# Altium PCB Blue_bug.PcbDoc
Units mm, origin at the board's own origin, x right, y up, seen from the top; angles counter-clockwise.
Board outline 17.86 x 23.75 mm, 2 copper layers (Top Layer, Bottom Layer); 12 components, 12 nets, 79 pads, 45 vias.
Unrouted connection lines stored in the file: 8.
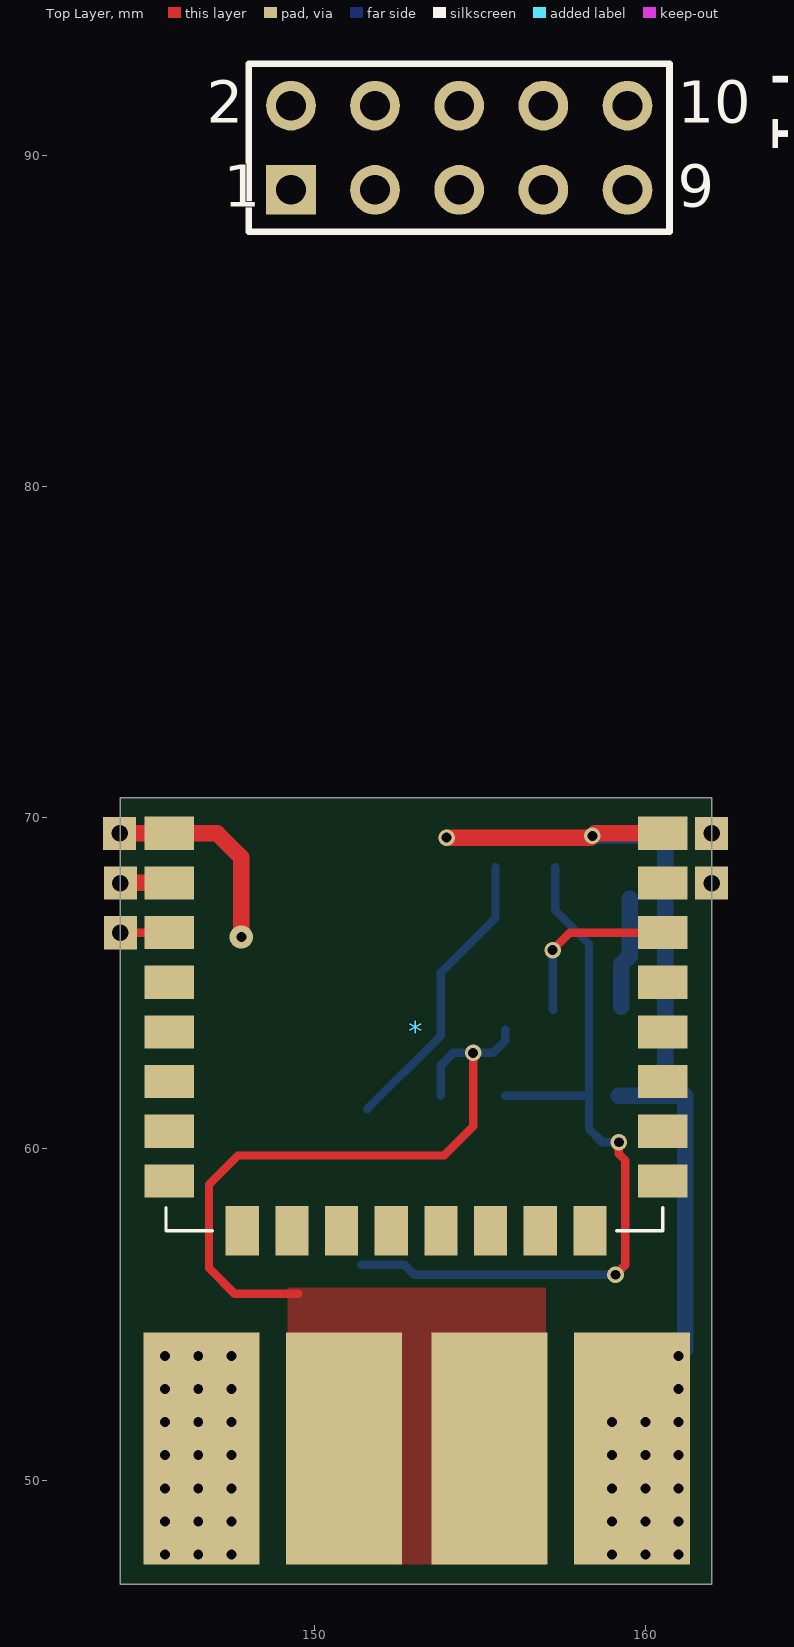
[diagram p0: Top Layer view]
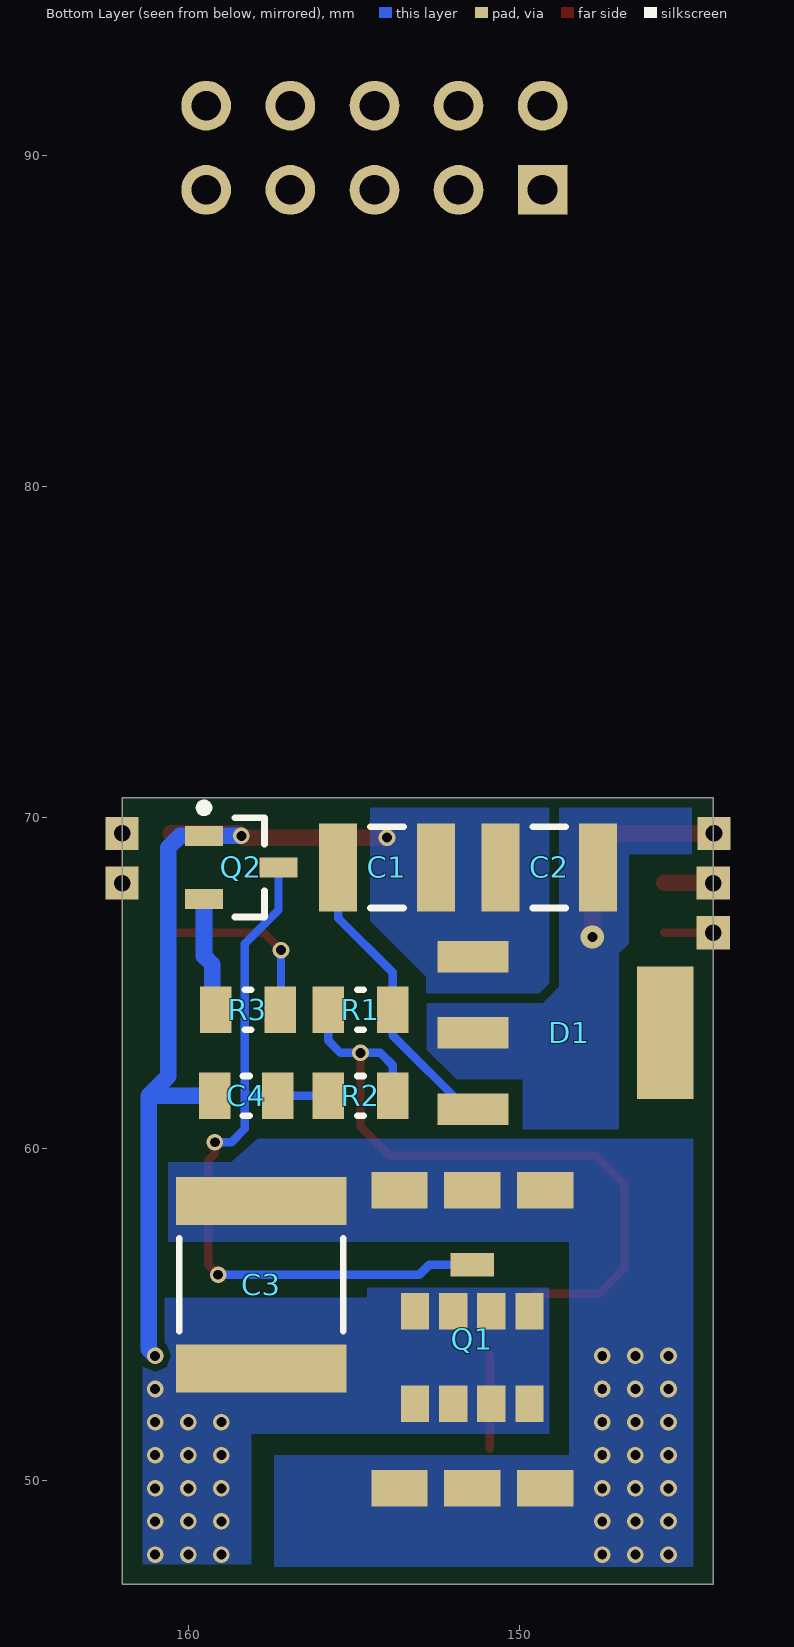
[diagram p1: Bottom Layer view, seen from below]

## Layer stack, top to bottom
Top Solder: solder mask 0.0102, Solder Resist, Dk 3.5
Top Layer: signal copper 0.0356
Dielectric 1: dielectric 0.32, FR-4, Dk 4.8
Bottom Layer: signal copper 0.0356
Bottom Solder: solder mask 0.0102, Solder Resist, Dk 3.5

## Board outline
144.145,46.85 162,46.85 162,70.6 144.145,70.6

## Design rules (kind name [scope] priority, off if disabled: settings)
Clearance Clearance_1 [All] p1: gap=0.2 except(0: Track-Fill Track-Poly Track-Region)
Clearance [All] p2: gap=0.2 except(0: Track-Fill Track-Poly Track-Region SMDPad-Via Via-Fill Via-Poly Via-Region)
PolygonConnect [All] p1: connectstyle=Direct reliefconductorwidth=0.254 reliefentries=4 polygonreliefangle="90 Angle" airgapwidth=0.254
RoutingVias [All] p1: holewidth=0.711 width=1.27 viastyle="Through Hole" minholewidth=0.3 minwidth=0.5 maxholewidth=0.711 maxwidth=1.27
SolderMaskExpansion [All] p1: expansion=0.102
Width [All] p1: maxlimit=1 minlimit=0.254 preferedwidth=0.5
30 further rules are at their usual default settings.

## Components (designator, comment, footprint, x,y, rotation, side; value= is the part's Value field where it differs from the comment)
* "JDY-08" JDY-08 160.528,57.531 r90 top
C1 "C1210" C1210 154,68.5 r0 bottom
C2 "C1210" C1210 149.1,68.5 r180 bottom
C3 "С2220" C2220 157.8,55.9 r90 bottom
C4 "0805" C0805 158.25,61.6 r180 bottom
D1 "AMS1117CD_3.3" SOT223 145.6,63.5 r270 bottom
P1 "Header 5X2" HDR2X5 149.3,88.96 r0 top
Q1 "IRF7739L2" "DIRFET L8" 151.425,58.75 r270 bottom
Q2 "PNP" SOT-23B_N 158.4,68.5 r180 bottom
R1 "R0805" R0805 154.8,64.2 r180 bottom
R2 "R0805" R0805 154.8,61.6 r180 bottom
R3 "R0805" R0805 158.2,64.2 r180 bottom

## Footprints (in the part's own frame and the unit in brackets; to place one, negate y for a bottom-side part, rotate by r counter-clockwise, add the part's x,y. Pads: shape width x height; smd on the part's side, far side on the other; paste and mask are expansions set on the pad)
C0805 [mm]
  rect 0.95x1.4 smd: 1(-0.95,0) 2(0.95,0)
  silkscreen extent -0.1,-0.6 0.1,0.6, body extent -1,-0.63 1,0.63, height 1.3
C1210 [mm] "CeramicCapasitor"
  rect 1.15x2.65 smd: 1(-1.475,0) 2(1.475,0)
  silkscreen extent -0.5,-1.22 0.5,1.23, body extent -1.6,-1.25 1.6,1.25, height 1.7
C2220 [mm] "Capacitor"
  rect 1.45x5.15 smd: 1(-2.525,0) 2(2.525,0)
  silkscreen extent -1.4,-2.47 1.4,2.48, body extent -2.8,-2.5 2.8,2.5, height 1.8
"DIRFET L8" [mm]
  rect 1.1x1.7 smd: D(0,-2.2) D(0,0) D(0,2.2) D(9,-2.2) D(9,0) D(9,2.2)
  rect 0.7x1.3 smd: G(2.25,0)
  rect 1.1x0.85 smd: S(3.65,-1.725) S(3.65,-0.575) S(3.65,0.575) S(3.65,1.725) S(6.45,-1.725) S(6.45,-0.575) S(6.45,0.575) S(6.45,1.725)
  body extent -0.7,-3.2 9.7,3.2, height 1
HDR2X5 [mm] "Connector; Header; 5x2 Position"
  rect 1.5x1.5 hole 0.9: 1(0,0)
  round 1.5 hole 0.9: 2(0,2.54) 3(2.54,0) 4(2.54,2.54) 5(5.08,0) 6(5.08,2.54) 7(7.62,0) 8(7.62,2.54) 9(10.16,0) 10(10.16,2.54)
  silkscreen extent -1.27,-1.27 11.43,3.81
JDY-08 [mm]
  rect 1x1.5 smd: 1(12,14.9) 2(10.5,14.9) 3(9,14.9) 4(7.5,14.9) 5(6,14.9) 6(4.5,14.9) 7(3,14.9) 8(1.5,14.9) 17(1.5,0) 18(3,0) 19(4.5,0) 20(6,0) 21(7.5,0) 22(9,0) 23(10.5,0) 24(12,0)
  rect 1.5x1 smd: 9(0,12.7) 10(0,11.2) 11(0,9.7) 12(0,8.2) 13(0,6.7) 14(0,5.2) 15(0,3.7) 16(0,2.2)
  silkscreen extent 0,0 0.7,15, body extent 0,0 19.6,15, height 1.5
R0805 [mm] "Chip Resistor, 2-Leads, Body 2,10x1,30mm, IPC Medium Density"
  rect 0.95x1.4 smd: 1(-0.975,0) 2(0.975,0)
  silkscreen extent -0.1,-0.6 0.1,0.6, body extent -1.1,-0.7 1.1,0.7, height 0.5
SOT223 [mm] "U?"
  rect 0.95x2.15 smd: 1(-2.3,-5.8) 2(0,-5.8) 3(2.3,-5.8)
  rect 4x1.7 smd: 4(0,0)
  body extent -2.9,-4.5 2.9,-1.1, height 3
SOT-23B_N [mm] "SOT23, 3-Leads, Body 2.9x1.3mm, Pitch 0.95mm, Lead Span 2.4mm, IPC Medium Density"
  rect 1.15x0.6 smd: 1(-1.125,0.95) 2(-1.125,-0.95) 3(1.125,0)
  silkscreen extent -1.25,-1.5 0.7,1.92, body extent -0.7,-1.5 0.7,1.5, height 1.14

## Part data
C4: "Capasitor"
P1: "Header, 5-Pin, Dual row"
Q2: "PNP Bipolar Transistor"

## Free pads (board coordinates)
  rect 3.5x7 smd: 2(146.6,50.95) 2(150.9,50.95) 2(155.3,50.95) 2(159.6,50.95)
  rect 1x1 hole 0.5: 3(144.125,69.525) 3(144.15,66.525) 3(144.15,68.025) 3(162,68.025) 3(162,69.525)

## Via types
v1: diameter 0.5/0.5 (per signal layer), hole 0.3, Top Layer to Bottom Layer, 44 vias
v2: diameter 0.7, hole 0.3, Top Layer to Bottom Layer, 1 vias

## Nets (pads, with @x,y where several pads share a name; then routed paths per layer and width w, separated by ;. In a path a pad name is that pad's centre, name@x,y a point inside that pad or via, vN(x,y) a via of type N, cw(c..) or ccw(c..) an arc to the next point about the centre after c; other vN are vias at no path point)
3.3V: *.1 C2.2 D1.2 P1.2 P1.9 pad.3@144.125,69.525 | length 6.4
  Top Layer w0.5: pad.3@144.125,69.525 *.1@145.622,69.525 ; *.1 147.069,69.531 147.8,68.8 v2(147.8,66.4)
12V: pad.2@150.9,50.95 pad.2@155.3,50.95 R1.1 R2.2 | length 22.8
  Top Layer w0.254: 149.525,55.625 147.6,55.625 146.825,56.4 146.825,58.925 147.7,59.8 153.925,59.8 154.8,60.675 v1(154.8,62.9) ; pad.2@150.9,50.95 pad.2@150.9,53.8
  Bottom Layer w0.254: R2.2 153.825,62.525 154.2,62.9 v1(154.8,62.9) 155.4,62.9 155.775,63.275 R1.1@155.775,63.6
CSN: P1.5
DC: *.2 P1.3 pad.3@144.15,68.025 | length 1.5
  Top Layer w0.5: pad.3@144.156,68.031 *.2
GND: *.24 C1.1 C2.1 C3.1 C4.1 D1.1 P1.1 pad.2@159.6,50.95 pad.3@162,69.525 Q1.S Q2.1 | length 26.7
  Top Layer w0.5: v1(154,69.4) 158.35,69.4 v1(158.4,69.45) 158.481,69.531 *.24
  Bottom Layer w0.5: v1(158.4,69.45) Q2.1 ; C4.1 161.2,61.6 ; Q2.1@159.575,69.5 Q2.1 ; v1(161,53.75) 161.2,53.95 161.2,61.6 ; Q2.1 160.25,69.45 160.604,69.096 160.604,67.041 160.6,67.037 160.6,62.2 161.2,61.6
  other v1: 159,47.75 160,47.75 161,47.75 159,48.75 160,48.75 161,48.75 159,49.75 160,49.75 161,49.75 159,50.75 160,50.75 161,50.75 159,51.75 160,51.75 161,51.75 161,52.75
IN: C3.2 pad.2@146.6,50.95 Q1.D
  other v1: 145.5,47.75 146.5,47.75 147.5,47.75 145.5,48.75 146.5,48.75 147.5,48.75 145.5,49.75 146.5,49.75 147.5,49.75 145.5,50.75 146.5,50.75 147.5,50.75 145.5,51.75 146.5,51.75 147.5,51.75 145.5,52.75 146.5,52.75 147.5,52.75 145.5,53.75 146.5,53.75 147.5,53.75
Net*_3: *.3 P1.4 pad.3@144.15,66.525 | length 1.5
  Top Layer w0.254: pad.3@144.15,66.525 145.622,66.525 *.3
Net*_22: *.22 R3.2 | length 5.4
  Top Layer w0.254: v1(157.2,66) 157.731,66.531 *.22
  Bottom Layer w0.254: v1(157.2,66) 157.2,64.225 R3.2
NetC1_2: C1.2 D1.3 R1.2 | length 8.9
  Bottom Layer w0.254: D1.3@151.6,61.2 153.825,63.425 R1.2 153.825,65.325 155.475,66.975 C1.2
NetC4_2: C4.2 Q1.G Q2.3 R2.1 | length 23.9
  Top Layer w0.254: v1(159.1,56.2) 159.4,56.5 159.4,59.65 159.2,59.85 v1(159.2,60.2)
  Bottom Layer w0.254: Q1.G 152.725,56.5 153.025,56.2 v1(159.1,56.2) ; R2.1 C4.2 158.288,61.6 158.3,61.588 ; Q2.3 157.275,67.217 158.3,66.192 158.3,61.588 ; v1(159.2,60.2) 158.7,60.2 158.3,60.6 158.3,61.588
NetQ2_2: Q2.2 R3.1 | length 3.4
  Bottom Layer w0.5: R3.1@159.275,64.3 159.275,65.575 159.525,65.825 Q2.2
RESETN: *.23 P1.7 pad.3@162,68.025
pads on no net: *.4 *.5 *.6 *.7 *.8 *.9 *.10 *.11 *.12 *.13 *.14 *.15 *.16 *.17 *.18 *.19 *.20 *.21 D1.4 P1.6 P1.8 P1.10

## Polygon pours and split planes (outlines as drawn)
3.3V on Bottom Layer "Bottom Layer-No Net" (solid, pour order 20): 148.8,70.3 144.8,70.3 144.8,68.9 146.7,68.9 146.7,66.2 147,65.9 147,60.6 149.9,60.6 149.9,62.1 151.9,62.1 152.8,63 152.8,64.4 149.3,64.4 148.8,64.9
GND on Bottom Layer "Bottom Layer-No Net" (solid, pour order 18): 154.5,70.3 149.1,70.3 149.1,65 149.4,64.7 152.808,64.7 152.808,65.192 154.5,66.885
IN on Bottom Layer "Bottom Layer-No Net" (solid, pour order 12): 144.75,60.3 144.75,47.375 157.4,47.375 157.4,50.75 148.5,50.75 148.5,57.2 160.6,57.2 160.6,59.6 158.7,59.6 157.9,60.3
GND on Bottom Layer "Bottom Layer-No Net" (solid, pour order 14): 149.1,55.8 149.1,51.4 158.1,51.4 158.1,47.45 161.375,47.45 161.375,55.5 154.6,55.5 154.6,55.8
12V on Top Layer "Bottom Layer-No Net" (solid, pour order 16): 152.5,54.4 149.2,54.4 149.2,55.8 157,55.8 157,47.45 152.5,47.45

## Silkscreen, mask and mechanical layers (free items; w line width, h text height)
Mechanical 1:
  the board outline again, w0.1

## Text inside footprints (layer, text, board x,y; h text height)
P1: Top Overlay "2" at 146.76,90.992 h1.27; Top Overlay "1" at 147.268,88.452 h1.27; Top Overlay "9" at 160.984,88.452 h1.27; Top Overlay "10" at 160.984,90.992 h1.27